# Allegro board MAIN.brd
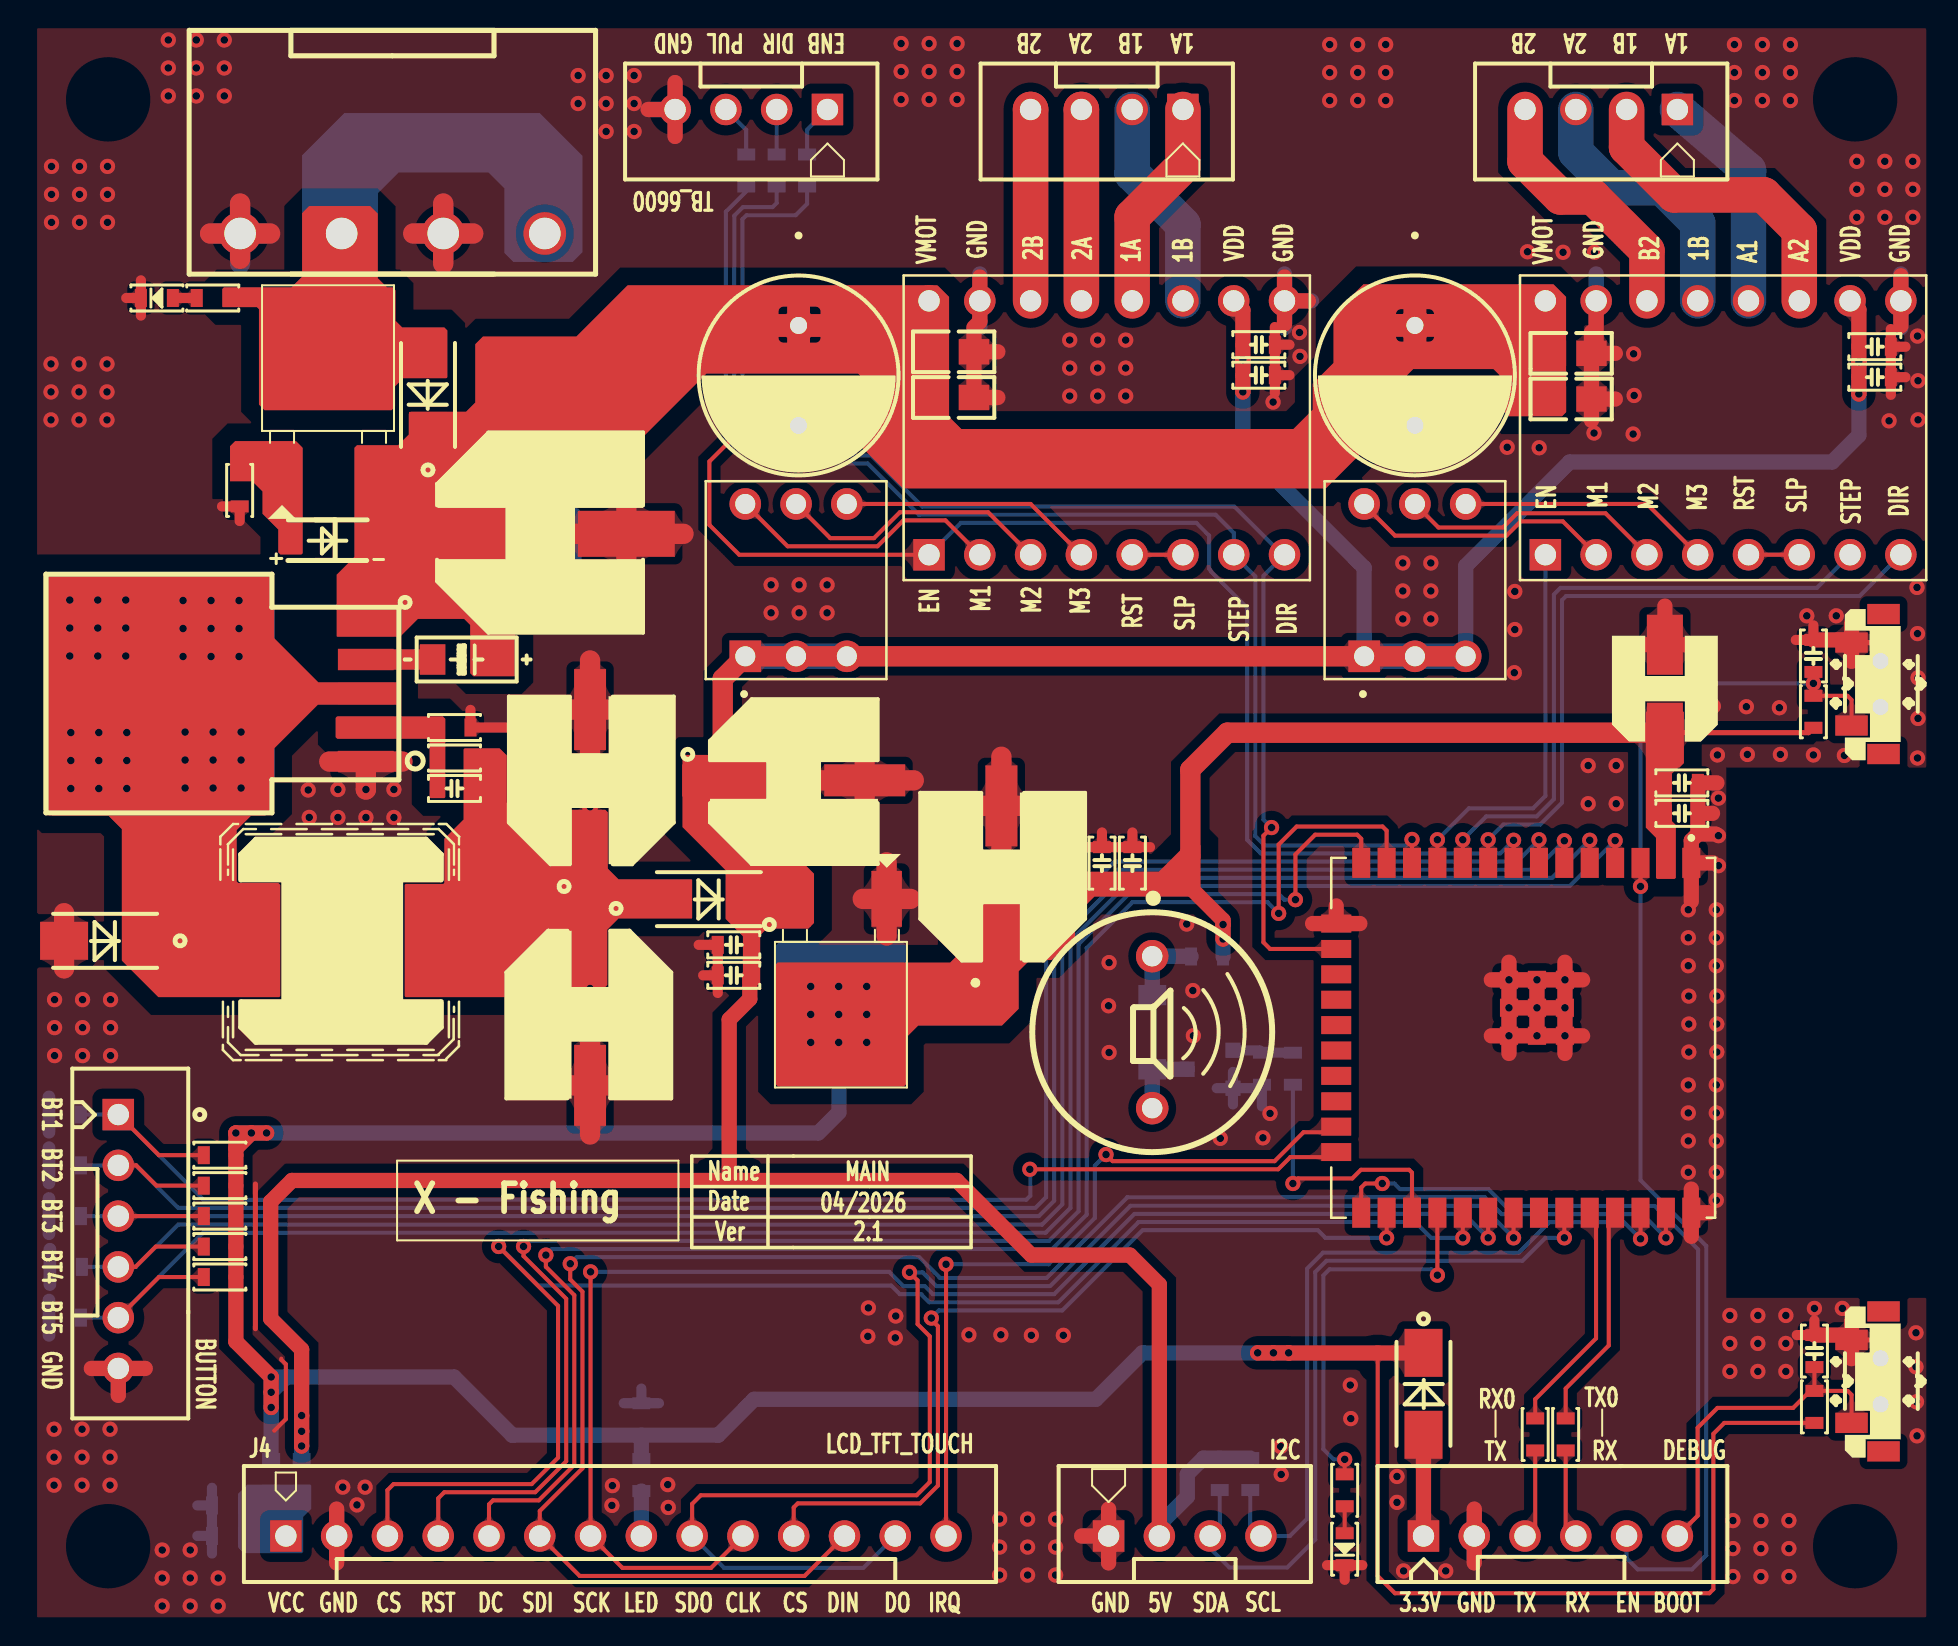
[diagram p0: board, top side]
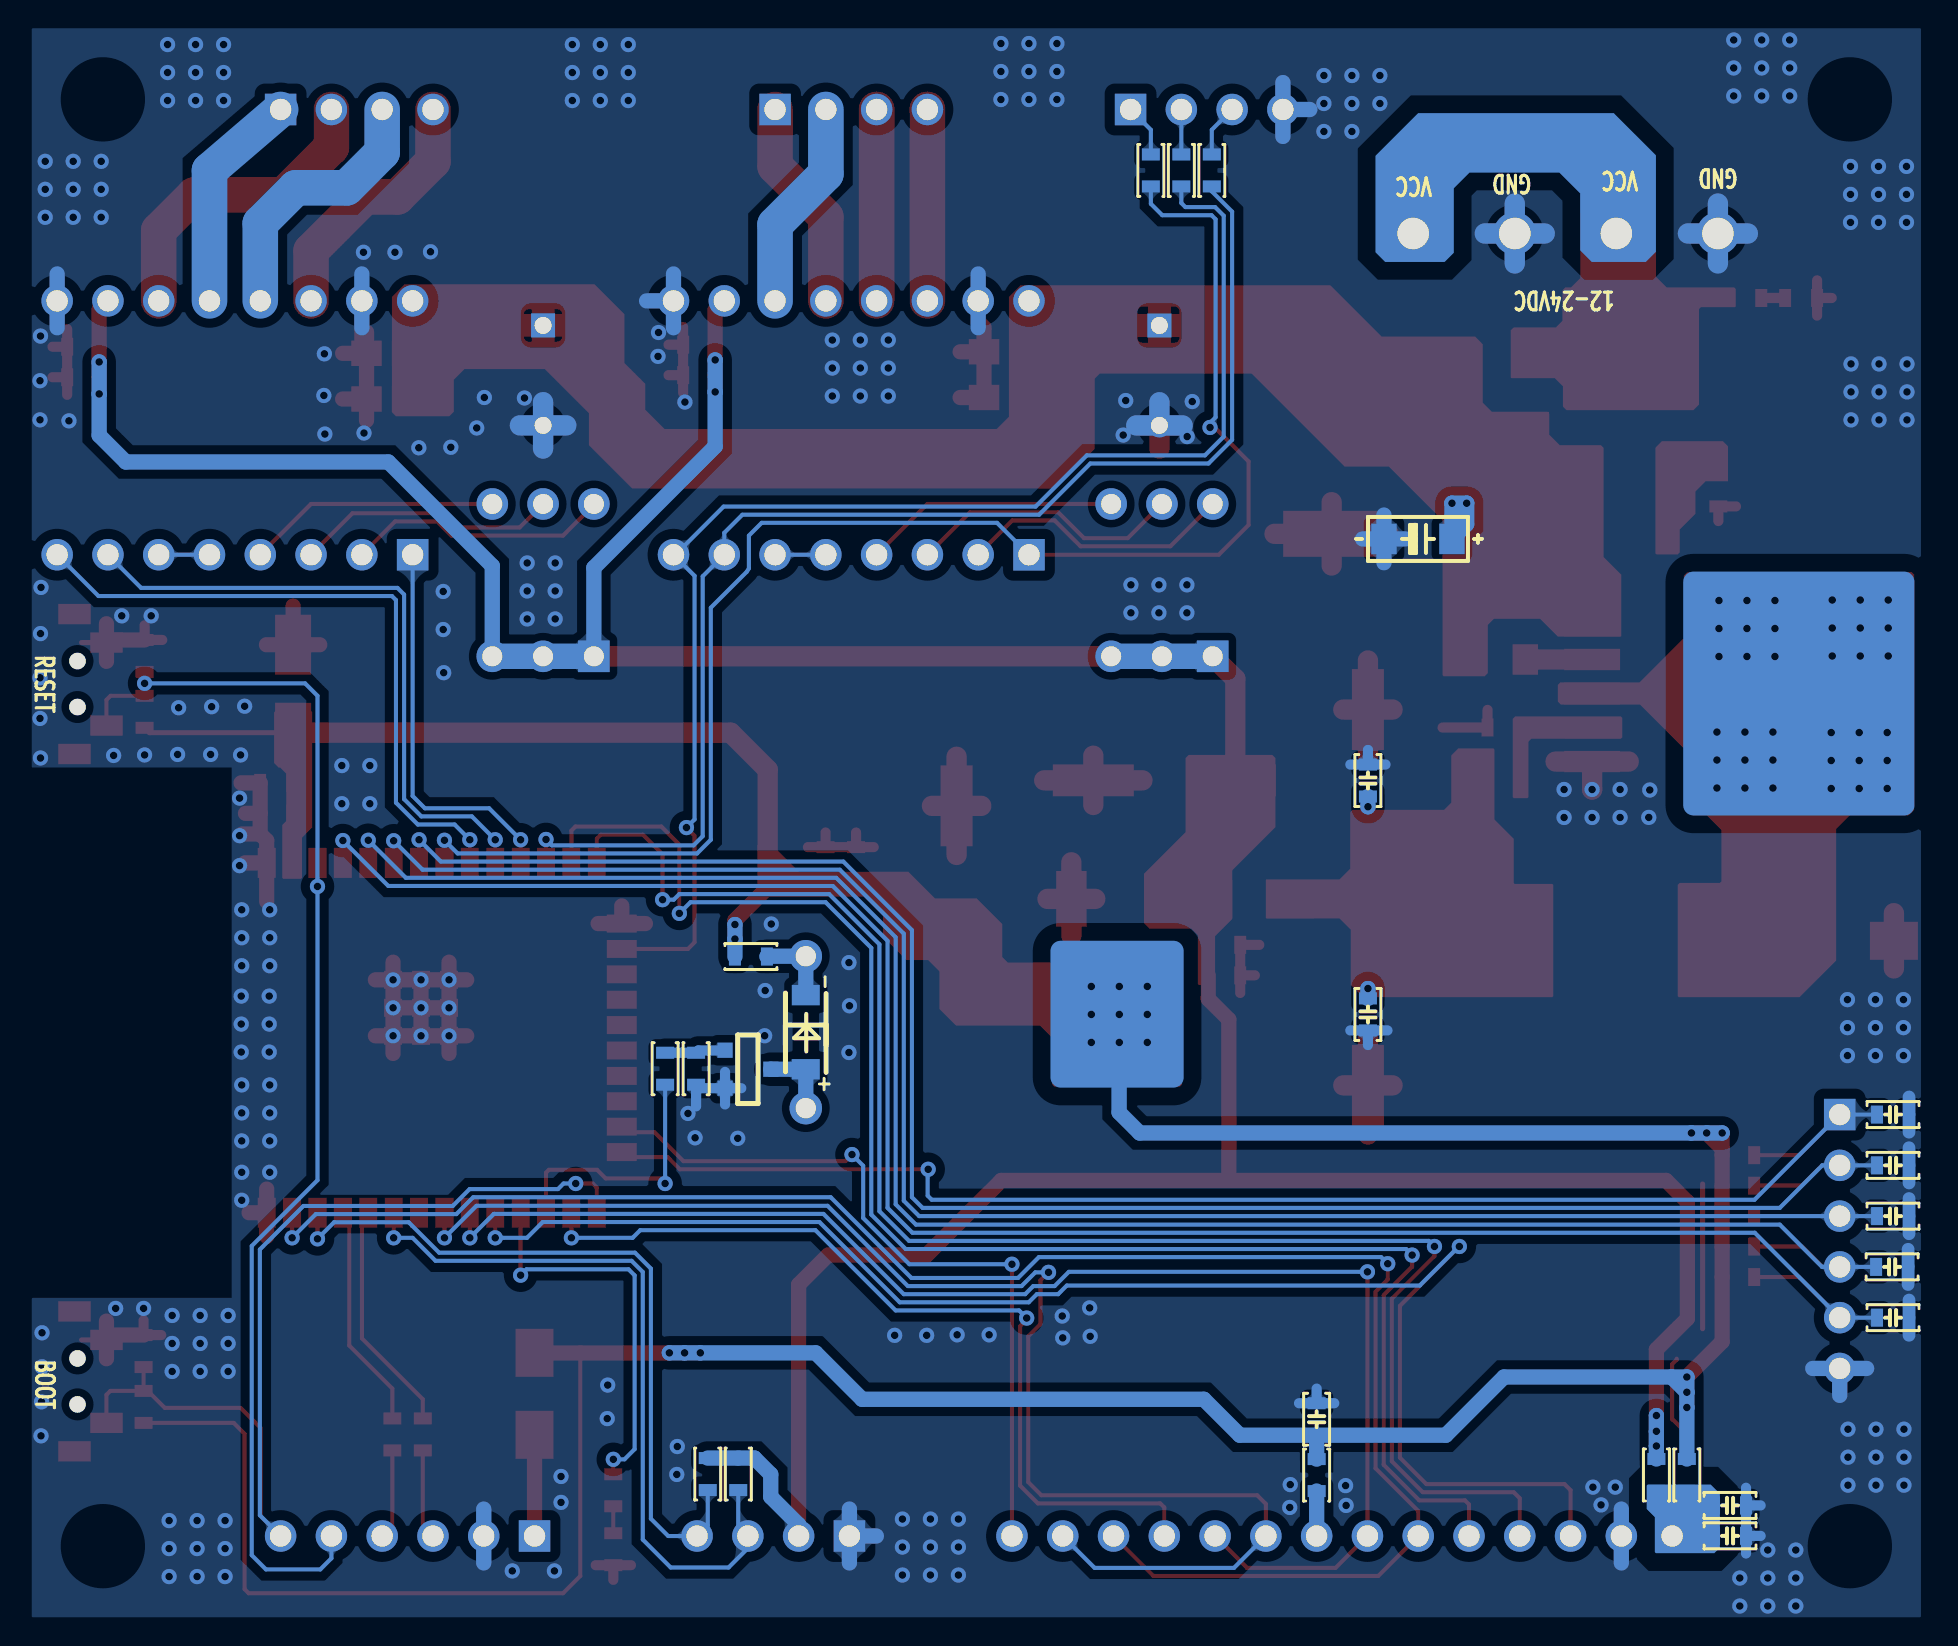
[diagram p1: board, bottom side, seen from below]

No outline. copper layers: TOP, BOTTOM. Coordinates in mm from the lowest, leftmost part position.

## Design rules (mm)
constraint set DEFAULT: min track width 0.203

## Placement (name value [footprint] x y rotation side)
B1  Through Hole  [BUZZER_TH]  56.03 29.52 0 top
C1  0.1uF  [C1206]  23.71 54.2 0 bottom
C2  330uF  [CASE_G]  25.41 54.45 0 top
C3  470uF  [RAD_SIZE_F]  27.91 30.41 270 top
C4  0.1uF  [C0603]  27.91 42.11 90 bottom
C5  220uF  [RAD_SIZE_F]  38.1 42.12 0 top
C6  1uF  [C0603]  82.52 40.47 0 top
C7  0.1uF  [C0603]  82.52 41.99 0 top
C8  0.1uF  [C0603]  89.1 48.34 90 top
C9  0.1uF  [C0603]  89.15 13.57 90 top
C10  470uF  [RAD_SIZE_F]  27.91 42.11 90 top
C11  0.1uF  [C0603]  35.1 33.89 180 top
C12  1uF  [C0603]  35.1 32.37 180 top
C13  0.1uF  [C0603]  53.52 37.98 90 top
C14  1uF  [C0603]  55.04 37.98 90 top
C15  470uF  [RAD_SIZE_F]  48.49 37.29 90 top
C17  0.1uF  [C0805]  46.1 63.56 90 top
C18  0.1uF  [C0805]  46.1 61.27 90 top
C19  1uF  [C0603]  92.18 63.81 0 top
C20  0.1uF  [C0603]  92.18 62.29 0 top
C21  220uF  [CAP_THRU_5MM]  69.17 62.38 270 top
C22  1uF  [C0603]  61.37 63.91 0 top
C23  0.1uF  [C0603]  61.37 62.39 0 top
C24  220uF  [CAP_THRU_5MM]  38.34 62.37 270 top
C25  0.1uF  [C0805]  76.99 63.48 90 top
C26  0.1uF  [C0805]  76.99 61.19 90 top
C27  0.1uF  [C0603]  9.8 5.85 180 bottom
C28  0.1uF  [C0603]  9.8 4.32 180 bottom
C29  100uF  [RAD_SIZE_C]  81.67 46.7 90 top
C30  0.1uF  [C0603]  30.48 10.16 90 bottom
C31  1uF  [C1206]  23.44 48.16 180 top
C32  1uF  [C0603]  27.91 30.41 270 bottom
C33  33nF  [C0603]  21.13 41.71 180 top
C34  0.1uF  [C0603]  1.65 25.4 180 bottom
C35  0.1uF  [C0603]  1.65 22.86 180 bottom
C36  0.1uF  [C0603]  1.65 20.32 180 bottom
C37  0.1uF  [C0603]  1.7 17.78 180 bottom
C38  0.1uF  [C0603]  1.65 15.24 180 bottom
D1  1N5819  [DO_214AC]  33.86 36.18 180 top
D2  SS34/B360  [DO_214AC]  3.66 34.09 180 top
D3  0603  [D0603]  6.25 66.25 180 top
D4  0603  [D0603]  65.66 3.66 270 top
D6  1N5819  [DO_214AC]  19.81 61.4 90 top
D7  1N4007  [DO_214AC]  69.6 11.43 270 top
D11  1N4148  [SOD_123]  56.03 29.52 90 bottom
DZ1  3.3V  [SOD_123]  14.81 54.13 0 top
J1  HEADER1X6  [HEADER1X6BUS]  69.6 4.32 0 top
J2  Domino4PinRA  [DOMINO4_200_RA]  18.03 69.47 180 top
J3  HEADER1X4  [SHDRV4W110P0_254_1X4]  53.85 4.32 0 top
J4  HEADER1X14  [HEADER_1X14_254_THRU]  12.7 4.32 0 top
J5  HEADER1X6  [HEADER1X6BUS]  4.32 25.4 270 top
J6  HEADER1X4  [SHDRV4W110P0_254_1X4]  57.57 75.68 180 top
J7  HEADER1X4  [SHDRV4W110P0_254_1X4]  82.3 75.68 180 top
J8  HEADER1X4  [SHDRV4W110P0_254_1X4]  39.79 75.68 180 top
L1  47uH  [DR127_SMD_IND]  15.52 34.09 0 top
NOREF  -  []  0 0 90 top
NOREF#2  -  []  0 80 0 top
Q1  AOD407  [DPAK]  14.81 61.4 0 top
Q3  MMBT2222  [SOT_23]  60.07 28.62 270 bottom
R1  10K  [R0603]  9.4 23.37 180 top
R2  0  [R0603]  13.49 7.37 90 bottom
R3  0  [R0603]  11.96 7.37 90 bottom
R4  2k2  [R0603]  30.48 7.37 90 bottom
R5  10K  [R0603]  9.4 21.84 180 top
R6  10K  [R0603]  9.4 20.32 180 top
R7  10K  [R0603]  9.4 18.8 180 top
R8  10K  [R0603]  9.4 17.27 180 top
R9  0  [R0603]  38.77 72.63 90 bottom
R10  0  [R0603]  76.71 9.4 270 top
R11  10K  [R0603]  89.1 45.55 270 top
R12  10K  [R0603]  89.15 10.78 270 top
R13  0  [R0603]  75.19 9.4 270 top
R14  0  [R0603]  37.25 72.63 90 bottom
R15  0  [R0603]  35.72 72.63 90 bottom
R16  2.2K  [R0603]  65.66 6.6 90 top
R17  2.2K  [R0603]  9.04 66.25 0 top
R18  4k7  [R0603]  60.93 7.42 270 bottom
R19  4k7  [R0603]  59.41 7.42 270 bottom
R20  2.2K  [R0603]  21.13 43.24 0 top
R21  2.2K  [R0603]  21.13 44.76 180 top
R23  47K  [R0603]  10.39 56.62 90 top
R33  10  [R0603]  58.78 33.31 180 bottom
R34  2k2  [R0603]  63.07 27.69 90 bottom
R35  10K  [R0603]  61.52 27.69 270 bottom
S1  DS01C_254_L_03  [SW_DS01C-254]  38.22 52.13 0 top
S2  DS01C_254_L_03  [SW_DS01C-254]  69.17 52.13 0 top
SW1  BUTTON  [BUTTON_SMD_2PIN_3X6X3_5_RA]  92.46 12.05 270 top
SW2  BUTTON  [BUTTON_SMD_2PIN_3X6X3_5_RA]  92.46 46.94 270 top
U2  LM1086  [DPAK]  40.46 32.24 180 top
U3  -  [ESP32_WROOM_32U]  74.59 29.24 270 top
U4  DRV_A4988  [MODULE_A4988]  53.76 59.75 90 top
U5  DRV8825  [IC_DRV8825]  84.59 59.76 90 top
U6  XL4015  [TO_263_5]  9.97 46.46 90 top

## Library data of the parts
B1 = buzzer
C1 C17 C18 C25 C26 C31 = NPOL_CAP
C2 C3 C5 C10 C15 C21 C24 C29 = POL_CAP
C4 C6-C9 C11-C14 C19 C20 C22 C23 C27 C28 C30 C32-C38 = NPOL_CAP: User Part Number: ***
D1 D2 D6 D7 = DIODE_AC
D3 D4 = LED: User Part Number: ***
D11 = DIODE
DZ1 = ZENER
J1 J5 = HEADER1X6
J2 J3 J6-J8 = HEADER1X4
J4 = HEADER1X14
L1 = IND_FERRITE
Q1 = MOSFET_P
Q3 = BJT_NPN
R1-R21 R23 R33-R35 = RES: User Part Number: ***
S1 S2 = DS01C_254_L_03
SW1 SW2 = SW_PUSHBUTTON_SPST_2P
U2 = LM1086_0
U3 = ESP32_WROOM_32U
U4 = DRV_A4988
U5 = DRV8825
U6 = XL4015_0

## Footprints (pads in the part's own frame, mm; a bottom-side part is the same pattern mirrored in y, then rotated)
BUTTON_SMD_2PIN_3X6X3_5_RA
  round 0.838 hole 0.813: (-1.15,0) (1.15,0)
  rect 1.016x1.626 smd: 1(-2.075,-1.45) 2(2.075,-1.45) 3(-3.5,0.15) 4(3.5,0.15)
BUZZER_TH
  round 1.626 hole 1.016: 1(0,3.8) 2(0,-3.8)
C0603
  rect 0.599x0.899 smd: 1(-0.8,0) 2(0.8,0)
C0805
  rect 1.27x1.524 smd: 1(0,1.016) 2(0,-1.016)
C1206
  rect 1.27x1.524 smd: 1(0,0) 2(3.4,0)
CAP_THRU_5MM
  rect 1.2x1.2 hole 0.85: 1(-2.5,0)
  round 1.2 hole 0.85: 2(2.5,0)
CASE_G
  rect 4.849x2.301 smd: 1(-4.318,0) 2(4.318,0)
D0603
  rect 0.599x0.899 smd: 1(-0.8,0) 2(0.8,0)
DO_214AC
  rect 2.4x1.9 smd: A(2.05,0) C(-2.05,0)
DOMINO4_200_RA
  round 2.134 hole 1.575: 1(-7.62,0) 2(-2.54,0) 3(2.54,0) 4(7.62,0)
DPAK
  rect 1.524x2.794 smd: 1(-2.286,-3.95) 3(2.286,-3.95)
  rect 6.299x6.096 smd: 2(0,2.3)
DR127_SMD_IND
  rect 4.318x5.588 smd: 1(-5.334,0) 2(5.334,0)
ESP32_WROOM_32U
  rect 1.5x0.9 smd: 1(-8.75,8.41) 2(-8.75,7.14) 3(-8.75,5.87) 4(-8.75,4.6) 5(-8.75,3.33) 6(-8.75,2.06) 7(-8.75,0.79) 8(-8.75,-0.48) 9(-8.75,-1.75) 10(-8.75,-3.02) 11(-8.75,-4.29) 12(-8.75,-5.56) 13(-8.75,-6.83) 14(-8.75,-8.1) 25(8.75,-8.1) 26(8.75,-6.83) 27(8.75,-5.56) 28(8.75,-4.29) 29(8.75,-3.02) 30(8.75,-1.75) 31(8.75,-0.48) 32(8.75,0.79) 33(8.75,2.06) 34(8.75,3.33) 35(8.75,4.6) 36(8.75,5.87) 37(8.75,7.14) 38(8.75,8.41)
  rect 0.9x1.5 smd: 15(-5.715,-9.35) 16(-4.445,-9.35) 17(-3.175,-9.35) 18(-1.905,-9.35) 19(-0.635,-9.35) 20(0.635,-9.35) 21(1.905,-9.35) 22(3.175,-9.35) 23(4.445,-9.35) 24(5.715,-9.35)
  rect 0.9x0.9 smd: 39_1(-2.9,2.09) 39_2(-1.5,2.09) 39_3(-0.1,2.09) 39_4(-2.9,0.69) 39_5(-1.5,0.69) 39_6(-0.1,0.69) 39_7(-2.9,-0.71) 39_8(-1.5,-0.71) 39_9(-0.1,-0.71)
HEADER1X6BUS
  rect 1.575x1.575 hole 1.067: 1(0,0)
  round 1.575 hole 1.067: 2(2.54,0) 3(5.08,0) 4(7.62,0) 5(10.16,0) 6(12.7,0)
HEADER_1X14_254_THRU
  rect 1.575x1.575 hole 1.067: 1(0,0)
  round 1.575 hole 1.067: 2(2.54,0) 3(5.08,0) 4(7.62,0) 5(10.16,0) 6(12.7,0) 7(15.24,0) 8(17.78,0) 9(20.32,0) 10(22.86,0) 11(25.4,0) 12(27.94,0) 13(30.48,0) 14(33.02,0)
IC_DRV8825
  rect 1.575x1.575 hole 1.067: 1(-6.35,8.89)
  round 1.575 hole 1.067: 2(-6.35,6.35) 3(-6.35,3.81) 4(-6.35,1.27) 5(-6.35,-1.27) 6(-6.35,-3.81) 7(-6.35,-6.35) 8(-6.35,-8.89) 9(6.35,-8.89) 10(6.35,-6.35) 11(6.35,-3.81) 12(6.35,-1.27) 13(6.35,1.27) 14(6.35,3.81) 15(6.35,6.35) 16(6.35,8.89)
MODULE_A4988
  rect 1.575x1.575 hole 1.067: 1(-6.35,8.89)
  round 1.575 hole 1.067: 2(-6.35,6.35) 3(-6.35,3.81) 4(-6.35,1.27) 5(-6.35,-1.27) 6(-6.35,-3.81) 7(-6.35,-6.35) 8(-6.35,-8.89) 9(6.35,-8.89) 10(6.35,-6.35) 11(6.35,-3.81) 12(6.35,-1.27) 13(6.35,1.27) 14(6.35,3.81) 15(6.35,6.35) 16(6.35,8.89)
R0603
  rect 0.599x0.899 smd: 1(-0.8,0) 2(0.8,0)
RAD_SIZE_C
  rect 3x1.8 smd: 1(-2.2,0) 2(2.2,0)
RAD_SIZE_F
  rect 4.049x1.6 smd: 1(-3.55,0) 2(3.55,0)
SHDRV4W110P0_254_1X4
  rect 1.575x1.575 hole 1.067: 1(0,0)
  round 1.575 hole 1.067: 2(2.54,0) 3(5.08,0) 4(7.62,0)
SOD_123
  rect 1.016x1.397 smd: 1(-1.854,0) 2(1.854,0)
SOT_23
  rect 0.762x0.762 smd: 1(0,0) 2(1.9,0) 3(0.95,2.291)
SW_DS01C-254
  rect 1.58x1.58 hole 1: 1A(-2.54,-3.81)
  round 1.58 hole 1: 1B(-2.54,3.81) 2A(0,-3.81) 2B(0,3.81) 3A(2.54,-3.81) 3B(2.54,3.81)
TO_263_5
  rect 1.067x2.794 smd: 1(-3.404,-6.731) 2(-1.702,-6.731) 3(0,-6.731) 4(1.702,-6.731) 5(3.404,-6.731)
  rect 11.43x10.668 smd: 6(0,3.683)

## Nets
+3.3V: C6.1 C7.1 C13.1 C14.1 C15.1 C29.1 C30.1 D7.C(CATHODE) R1.1 R3.2 R4.2 R5.1 R6.1 R7.1 R8.1 R11.2 R12.2 R33.1 U2.2(OUTPUT) U3.2
+5V: C5.1 C11.1 C12.1 C19.1 C20.1 C22.1 C23.1 D1.C(CATHODE) J3.2 R2.2 R18.1 R19.1 S1.1A S1.2A S1.3A S2.1A S2.2A S2.3A U2.3 U4.10 U5.10
+24V: D6.A J2.1 J2.3 Q1.2 R17.2
+24V_OUT: C1.1 C2.1 C17.1 C18.1 C21.1 C24.1 C25.1 C26.1 C31.1 D6.C(CATHODE) DZ1.2(CATHODE) Q1.3(SOURCE) U4.16(VMOT) U5.16(VMOT) U6.5(VIN)
GND: C1.2 C2.2 C3.2 C4.2 C5.2 C6.2 C7.2 C8.2 C9.2 C10.2 C11.2 C12.2 C13.2 C14.2 C15.2 C17.2 C18.2 C19.2 C20.2 C21.2 C22.2 C23.2 C24.2 C25.2 C26.2 C27.2 C28.2 C29.2 C30.2 C32.2 C34.2 C35.2 C36.2 C37.2 C38.2 D2.A D3.2(CATHODE) D4.2(CATHODE) J1.2 J2.2 J2.4 J3.1 J4.2 J5.6 J8.4 Q3.2 R21.1 R23.1 R35.2 SW1.1 SW2.1 U2.1 U3.1 U3.15 U3.38 U3.39_1 U3.39_2 U3.39_3 U3.39_4 U3.39_5 U3.39_6 U3.39_7 U3.39_8 U3.39_9 U4.9 U4.15 U5.9 U5.15 U6.1
VCC: C27.1 C28.1 J4.1 R2.1 R3.1
1A: J6.1 U4.12
1B: J6.2 U4.11
2A: J6.3 U4.13
2B: J6.4 U4.14
A1: J7.1 U5.12
A2: J7.2 U5.11
B1: J7.3 U5.13
B2: J7.4 U5.14
BTN1: C34.1 J5.1 R1.2 U3.24
BTN2: C35.1 J5.2 R5.2 U3.7
BTN3: C36.1 J5.3 R6.2 U3.6
BTN4: C37.1 J5.4 R7.2 U3.5
BTN5: C38.1 J5.5 R8.2 U3.4
BUZZER: R34.1 U3.27
DIR_4988: R14.1 U3.16 U4.8
DIR_6600: J8.2 R14.2
DIR_8825: U3.9 U5.8
EN: C8.1 J1.5 R11.1 SW2.2 U3.3
ENB_4988: R9.1 U3.8 U4.1
ENB_6600: J8.1 R9.2
ENB_8825: U3.11 U5.1
IO0_BOOT: C9.1 J1.6 R12.1 SW1.2 U3.25
LED: R16.2 U3.28
M0: S2.1B U5.2
M1: S2.2B U5.3
M2: S2.3B(NO3) U5.4
MS1: S1.1B U4.2
MS2: S1.2B U4.3
MS3: S1.3B(NO3) U4.4
PUL_6600: J8.3 R15.2
RX: J1.4 R10.2
RXD0: R13.1 U3.34
SCL: J3.4 R18.2 U3.36
SDA: J3.3 R19.2 U3.33
STEP_4988: R15.1 U3.12 U4.7
STEP_8825: U3.10 U5.7
T_CS: J4.11 U3.26
T_IRQ: J4.14 U3.23
TFT_CS: J4.3 U3.29
TFT_DC: J4.5 U3.13
TFT_LED: J4.8 R4.1
TFT_RST: J4.4 U3.14
TFT_SCK: J4.7 J4.10 U3.30
TFT_SDI: J4.6 J4.12 U3.37
TFT_SDO: J4.9 J4.13 U3.31
TX: J1.3 R13.2
TXD0: R10.1 U3.35(TXD0/IO1)
N15737205: B1.1 D11.2(CATHODE) R33.2
N15737229: B1.2(-) D11.1 Q3.3(E)
N15737285: Q3.1 R34.2 R35.1
N15870025: D4.1 R16.1
N15928174: D7.A J1.1
N15936945: U4.5 U4.6
N15939447: U5.5 U5.6
N15940057: D3.1 R17.1
N15940775: D2.C(CATHODE) L1.1 U6.3 U6.6
N15941130: C31.2 U6.4
N15942034: C3.1 C4.1 C10.1 C32.1 C33.1 D1.A L1.2 R20.2
N15942465: C33.2 R20.1 R21.2 U6.2
N15945795: DZ1.1 Q1.1 R23.2

Pads without a net: SW1 3 4; SW2 3 4; U3 17 18 19 20 21 22 32

## Via types
v1: diameter 0.762, hole 0.381, TOP to BOTTOM, 372 vias

## Routing (per net, layer and track width the routed paths; a pad name or vN(x,y) marks a point on that pad's centre or on a via; arc(x,y) is an arc through that point)
+3.3V: length 206.6
  TOP w0.203: R12.2 84.65,9.98 84.1,9.43 84.1,1.66 83.9,1.45 68.17,1.45 67.31,2.32 67.31,13.47
  TOP w0.254: C29.1 88.86,44.5 R11.2
  TOP w0.762: v1(11.96,10.75) v1(11.96,11.51) v1(11.96,12.27) 11.96,12.27 10.2,14.04 R8.1 R7.1 R6.1 R5.1 R1.1 10.2,23.7 ; v1(61.31,13.48) v1(62.09,13.48) v1(62.86,13.48) 62.86,13.47 69.59,13.47 D7.C ; 10.2,23.7 v1(10.2,24.48) v1(10.97,24.48) ; 10.2,23.7 v1(10.97,24.48) ; 57.16,37.53 59.58,35.12 v1(59.58,34.91) v1(59.58,34.18) ; v1(10.97,24.48) v1(11.73,24.48)
  TOP w1.016: 56.72,37.09 57.94,38.31 57.94,42.65 59.79,44.5 C29.1
  BOTTOM w0.762: v1(10.2,24.48) v1(10.97,24.48) v1(11.73,24.48) 39.33,24.48 40.36,25.51 40.36,30.41 ; C30.1 24.02,9.36 21.11,12.27 12.73,12.27 ; C30.1 34.32,9.36 36.12,11.16 53.21,11.16 55.54,13.48 v1(61.31,13.48) v1(62.09,13.48) v1(62.86,13.48) ; C30.1 R4.2 ; 12.73,12.27 v1(11.96,11.51) ; 12.73,12.27 v1(11.96,12.27) v1(11.96,11.51) ; R3.2 v1(11.96,10.75) v1(11.96,11.51) ; v1(59.58,34.91) v1(59.58,34.18) R33.1
  vias: v1(38.95,31.81) v1(38.95,30.41) v1(38.95,29.01) v1(40.35,31.81) v1(40.35,30.41) v1(40.35,29.01) v1(41.75,31.81) v1(41.75,30.41) v1(41.75,29.01)
+5V: length 202.8
  TOP w0.762: C12.1 35.9,31.18 34.87,30.16 34.87,22.1 ; J3.2 56.39,16.89 54.91,18.37 49.99,18.37 46.25,22.1 34.87,22.1 ; v1(13.49,8.82) v1(13.49,9.56) v1(13.49,10.34) 13.49,13.65 11.94,15.2 11.94,21.04 13,22.1 34.87,22.1 ; U4.10 60.57,65.65 C22.1 v1(60.57,63.15) C23.1 v1(60.57,61.55) ; U5.10 91.38,65.67 C19.1 v1(91.38,63.05) C20.1 v1(91.38,61.45)
  TOP w1.016: S2.3A S2.2A S2.1A S1.3A S1.2A S1.1A 34.55,47.2 C5.1
  BOTTOM w0.762: S2.3A 71.71,52.85 76.91,58.04 90.04,58.04 91.38,59.38 v1(91.38,61.45) v1(91.38,63.05) ; S2.1A 66.63,52.75 60.57,58.82 v1(60.57,61.55) v1(60.57,63.15) ; J3.2 56.39,4.88 57.78,6.28 57.78,7.4 58.6,8.22 R19.1 R18.1 ; v1(13.49,10.34) v1(13.49,9.56) v1(13.49,8.82) R2.2
  BOTTOM w1.27: S2.3A S2.2A S2.1A ; S1.3A S1.2A S1.1A
+24V_OUT: length 15.7
  TOP w0.762: v1(22.98,55.98) v1(23.71,55.98)
  TOP w1.143: C24.1 38.34,63.67 ; C24.1 36.76,64.87 ; C24.1 38.34,66.18 ; C24.1 39.72,64.87 ; C21.1 69.17,66.01 ; C21.1 67.74,64.88 ; C21.1 70.36,64.88 ; C21.1 69.17,63.75
  BOTTOM w0.762: v1(23.71,55.98) v1(22.98,55.98) 22.98,54.93 C1.1 v1(23.71,55.98)
GND: length 292.4
  TOP w0.203: 12.47,13.19 12.47,13.14 12.7,12.91 12.7,10.17 12.12,9.58
  TOP w0.254: SW1.1 92.25,14.13 ; SW2.1 92.25,49.01 ; 11.18,21.93 11.18,14.69
  TOP w0.508: 89.1,49.87 C8.2 88.22,49.14 ; C22.2 62.9,63.91 ; C22.2 C23.2 ; C22.2 62.17,64.79 ; C23.2 62.9,62.39 ; C23.2 62.17,61.51 ; D3.2 5.45,65.37 ; D3.2 4.72,66.25 ; D3.2 5.45,67.13 ; 24.18,44.76 R21.1 21.93,45.64 ; C13.2 52.64,38.78 ; C13.2 C14.2 ; C13.2 53.52,39.51 ; 10.39,55.09 R23.1 9.51,55.82 ; C20.2 92.98,61.41 ; C20.2 93.71,62.29 ; C20.2 C19.2 ; 88.27,14.37 C9.2 89.15,15.1 ; C19.2 93.71,63.81 ; C19.2 92.98,64.69 ; C14.2 55.04,39.51 ; C14.2 55.92,38.78 ; C12.2 33.57,32.37 ; C12.2 34.3,31.48 ; C12.2 C11.2 33.35,33.89 ; 62.65,64.91 62.65,64.95 ; D4.2 64.78,2.86 ; D4.2 66.54,2.86 ; D4.2 65.66,2.13
  TOP w0.762: C25.2 C26.2 ; C25.2 78,64.55 ; C25.2 78.24,63.71 U5.15 ; C25.2 79.2,63.48 ; C26.2 79.2,61.19 ; C26.2 78,60.13 ; 84.22,39.43 83.32,39.43 83,39.11 U3.1 ; v1(73.88,32.14) 72.99,32.14 ; v1(73.88,32.14) v1(73.88,30.74) ; v1(73.88,32.14) v1(75.28,32.14) ; v1(73.88,32.14) 73.88,33.02 ; U3.15 64.05,34.95 ; U3.15 65.24,35.84 ; U3.15 66.42,34.95 ; C17.2 48.31,63.56 ; C17.2 47.12,64.62 ; C17.2 C18.2 48.31,61.27 ; v1(75.28,29.34) v1(76.68,29.34) ; v1(75.28,29.34) v1(73.88,29.34) ; v1(75.28,29.34) v1(75.28,30.74) ; v1(76.68,29.34) v1(76.68,30.74) ; v1(76.68,29.34) 76.68,28.46 ; v1(76.68,29.34) 77.56,29.34 ; v1(76.68,30.74) v1(76.68,32.14) ; v1(76.68,30.74) v1(75.28,30.74) ; v1(75.28,32.14) v1(76.68,32.14) ; v1(75.28,32.14) v1(75.28,30.74) ; v1(76.68,32.14) 77.56,32.14 ; v1(76.68,32.14) 76.68,33.02 ; SW1.1 91.01,13.19 ; SW1.1 90.77,14.37 C9.2 ; SW1.1 91.01,15.07 ; v1(73.88,30.74) v1(73.88,29.34) ; v1(73.88,30.74) v1(75.28,30.74) ; C29.2 80.34,48.9 ; C29.2 83.01,48.9 ; C29.2 81.67,50.83 ; J8.4 32.17,77.02 ; J8.4 30.82,75.68 ; J8.4 32.17,74.33 ; U4.9 62.65,67.3 ; U4.9 62.65,64.95 ; U4.9 63.85,66.1 ; 47.12,64.78 47.41,65.07 U4.15 47.41,67.3 ; U3.38 83,19.31 ; U3.38 83.88,20.49 ; U3.38 83,21.67 ; 72.14,2.97 J1.2 72.14,5.66 ; C6.2 84.06,40.47 ; C6.2 C7.2 84.28,41.99 ; C6.2 83.32,39.59 ; J5.6 2.97,12.7 ; J5.6 5.66,12.7 ; J5.6 4.32,11.35 ; SW2.1 91.01,49.95 ; SW2.1 91.01,48.07 ; SW2.1 90.88,49.14 C8.2 ; v1(73.88,29.34) 72.99,29.34 ; v1(73.88,29.34) 73.88,28.46 ; U3.1 83,36.06 ; U3.1 84.08,37.99 ; 93.48,64.85 U5.9 93.48,67.36 ; J3.1 53.85,5.66 ; J3.1 52.5,4.32 ; J3.1 53.85,2.97 ; 15.24,2.97 J4.2 15.24,5.66
  TOP w1.016: C15.2 49.72,40.84 ; C15.2 48.49,43.3 ; C15.2 48.49,38.39 ; C15.2 47.26,40.84 ; J2.4 8.91,69.47 ; J2.4 10.41,70.97 ; J2.4 11.91,69.47 ; J2.4 10.41,68.21 ; 1.61,35.47 D2.A 1.61,32.71 ; C21.2 70.33,59.88 ; C21.2 68.01,59.88 ; C21.2 69.17,58.72 ; C21.2 69.17,61.04 ; U6.1 18.53,43.06 ; U6.1 14.87,43.06 ; U6.1 16.7,41.66 v1(16.7,41.66) ; C3.2 27.91,24.4 ; C3.2 27.91,29.32 ; C3.2 26.68,26.86 ; C3.2 29.15,26.86 ; C24.2 38.34,61.03 ; C24.2 38.34,58.71 ; C24.2 39.5,59.87 ; C24.2 37.18,59.87 ; C10.2 26.68,45.66 ; C10.2 29.15,45.66 ; C10.2 27.91,43.2 ; C10.2 27.91,48.12 ; C5.2 41.65,40.89 ; C5.2 44.11,42.12 ; C5.2 39.19,42.12 ; C5.2 41.65,43.35 ; U2.1 42.75,34.36 ; U2.1 42.75,38.02 ; U2.1 43.94,36.19 ; U2.1 41.55,36.19 ; J2.2 20.57,70.97 ; J2.2 20.57,67.98 ; J2.2 22.07,69.47 ; J2.2 19.07,69.47 ; C2.2 29.73,56.03 ; C2.2 29.73,52.87 ; C2.2 32.59,54.45 ; C2.2 26.87,54.45
  BOTTOM w0.508: C28.2 C27.2 ; C28.2 8.27,4.32 ; C28.2 9,3.44 ; C27.2 8.27,5.85 ; C27.2 9,6.73 ; Q3.2 60.07,27.53 ; Q3.2 61.35,26.72 R35.2 61.52,25.81 ; Q3.2 60.07,25.91 ; Q3.2 59.26,26.72 ; C4.2 28.8,42.91 ; C4.2 27.91,43.64 ; C4.2 27.03,42.91 ; C32.2 27.91,28.88 ; C32.2 28.8,29.61 ; C32.2 26.94,29.61 ; C30.2 30.48,11.69 ; C30.2 31.36,10.96 ; C30.2 29.6,10.96
  BOTTOM w0.635: 0.85,21.2 C36.2 0.85,19.44 ; 0.85,14.36 C38.2 0.85,16.12 ; 0.85,26.28 C34.2 0.85,24.52 ; 0.85,23.74 C35.2 0.85,21.98 ; 0.9,16.9 C37.2 0.9,18.66
  BOTTOM w0.762: J3.1 53.85,5.66 ; J3.1 53.85,2.97 ; J3.1 52.5,4.32 ; C1.2 26.05,54.2 ; C1.2 28.18,54.2 ; C1.2 27.11,53 ; C1.2 27.11,55.39 ; J5.6 2.97,12.7 ; J5.6 4.32,11.35 ; J5.6 5.66,12.7 ; U4.9 62.65,64.76 ; U4.9 64,66.1 ; U4.9 62.65,67.45 ; 78.24,64.76 U5.15 78.24,67.45 ; 47.41,64.76 U4.15 47.41,67.45 ; 72.14,2.97 J1.2 72.14,5.66 ; 93.48,67.45 U5.9 93.48,64.76 ; 15.24,2.97 J4.2 15.24,5.66 ; J8.4 32.17,74.33 ; J8.4 32.17,77.02 ; J8.4 30.82,75.68
  BOTTOM w1.016: C21.2 68.01,59.88 ; C21.2 69.17,61.04 ; C21.2 70.33,59.88 ; C21.2 69.17,58.72 ; C24.2 38.34,61.03 ; C24.2 39.5,59.87 ; C24.2 37.18,59.87 ; J2.2 20.57,67.98 ; J2.2 20.57,70.97 ; J2.2 19.07,69.47 ; J2.2 22.07,69.47 ; J2.4 10.41,67.98 ; J2.4 10.41,70.97 ; J2.4 8.91,69.47 ; J2.4 11.91,69.47
  vias: v1(0.98,72.83) v1(0.98,71.43) v1(0.98,70.03) v1(0.95,62.95) v1(0.95,61.55) v1(0.95,60.15) v1(1.13,31.15) v1(1.13,29.75) v1(1.13,28.35) v1(1.11,9.66) v1(1.11,8.26) v1(1.11,6.86) v1(2.38,72.83) v1(2.38,71.43) v1(2.38,70.03) v1(2.35,62.95) v1(2.35,61.55) v1(2.35,60.15) v1(2.53,31.15) v1(2.53,29.75) v1(2.53,28.35) v1(2.51,9.66) v1(2.51,8.26) v1(2.51,6.86) v1(3.78,72.83) v1(3.78,71.43) v1(3.78,70.03) v1(3.75,62.95) v1(3.75,61.55) v1(3.75,60.15) v1(3.93,31.15) v1(3.93,29.75) v1(3.93,28.35) v1(3.91,9.66) v1(3.91,8.26) v1(3.91,6.86) v1(6.52,3.62) v1(6.52,2.22) v1(6.52,0.82) v1(6.82,79.16) v1(6.82,77.76) v1(6.82,76.36) v1(7.92,3.62) v1(7.92,2.22) v1(7.92,0.82) v1(8.22,79.16) v1(8.22,77.76) v1(8.22,76.36) v1(9.32,2.22) v1(9.32,0.82) v1(9.62,79.16) v1(9.62,77.76) v1(9.62,76.36) v1(13.82,41.64) v1(13.87,40.26) v1(15.3,41.66) v1(15.3,40.26) v1(15.54,6.76) v1(16.26,5.87) v1(16.7,40.26) v1(16.66,6.76) v1(18.1,41.66) v1(18.1,40.26) v1(27.32,77.38) v1(27.32,75.98) v1(28.72,77.38) v1(28.72,75.98) v1(28.72,74.58) v1(29.03,6.84) v1(29.01,5.85) v1(30.12,77.38) v1(30.12,75.98) v1(30.12,74.58) v1(31.8,6.89) v1(31.83,5.75) v1(36.7,61.07) v1(36.96,59.31) v1(36.97,51.9) v1(36.97,50.5) v1(38.37,51.9) v1(38.37,50.5) v1(39.77,51.9) v1(39.77,50.5) v1(40.03,61.12) v1(40.16,59.39) v1(41.83,15.73) v1(41.81,14.31) v1(43.21,15.32) v1(43.18,14.23) v1(43.47,78.98) v1(43.47,77.58) v1(43.47,76.18) v1(44.87,78.98) v1(44.87,77.58) v1(44.87,76.18) v1(46.27,78.98) v1(46.27,77.58) v1(46.27,76.18) v1(46.86,14.38) v1(48.4,5.17) v1(48.4,3.77) v1(48.4,2.37) v1(48.46,14.38) v1(49.8,5.17) v1(49.8,3.77) v1(49.8,2.37) v1(49.99,14.36) v1(51.2,5.17) v1(51.2,3.77) v1(51.2,2.37) v1(51.59,14.36) v1(51.91,64.14) v1(51.91,62.74) v1(51.91,61.34) v1(53.31,64.14) v1(53.31,62.74) v1(53.31,61.34) v1(53.85,30.84) v1(53.87,33) v1(53.87,28.5) v1(54.71,64.14) v1(54.71,62.74) v1(54.71,61.34) v1(57.76,34.93) v1(58.06,31.6) v1(58.09,29.34) v1(59.44,24.21) v1(61.57,24.24) v1(61.93,25.46) v1(62.08,61.04) v1(62.46,8.79) v1(62.48,7.4) v1(63.4,64.52) v1(63.42,63.33) v1(64.91,78.93) v1(64.91,77.53) v1(64.91,76.13) v1(65.94,11.87) v1(65.96,10.19) v1(66.31,78.93) v1(66.31,77.53) v1(66.31,76.13) v1(67.71,78.93) v1(67.71,77.53) v1(67.71,76.13) v1(68.28,7.3) v1(68.28,6) v1(68.57,52.99) v1(68.57,51.59) v1(68.57,50.19) v1(68.61,2.57) v1(69.97,52.99) v1(69.97,51.59) v1(69.97,50.19) v1(70.1,61.25) v1(70.71,2.57) v1(72.11,61.27) v1(72.49,59.75) v1(73.79,58.78) v1(74.14,47.5) v1(74.17,51.57) v1(74.17,49.66) v1(74.8,68.56) v1(75.39,58.76) v1(76.58,68.54) v1(77.84,42.86) v1(77.84,40.95) v1(78.13,59.49) v1(78.16,68.54) v1(79.24,42.86) v1(79.24,40.95) v1(80.11,63.46) v1(80.14,61.37) v1(80.09,59.44) v1(82.85,35.65) v1(82.85,34.25) v1(82.85,32.85) v1(82.85,26.88) v1(82.85,25.48) v1(82.85,24.08) v1(82.85,22.51) v1(82.87,31.33) v1(82.87,29.93) v1(82.87,28.53) v1(84.1,45.83) v1(84.25,35.65) v1(84.25,34.25) v1(84.25,32.85) v1(84.25,26.88) v1(84.25,25.48) v1(84.25,24.08) v1(84.25,22.51) v1(84.25,21.11) v1(84.3,43.39) v1(84.27,31.33) v1(84.27,29.93) v1(84.27,28.53) v1(84.35,41.23) v1(84.35,39.35) v1(84.35,37.85) v1(84.93,15.35) v1(84.93,13.95) v1(84.93,12.55) v1(85.08,5.09) v1(85.08,3.69) v1(85.08,2.29) v1(85.15,78.93) v1(85.15,77.53) v1(85.15,76.13) v1(85.75,45.8) v1(85.8,43.41) v1(86.33,15.35) v1(86.33,13.95) v1(86.33,12.55) v1(86.48,5.09) v1(86.48,3.69) v1(86.48,2.29) v1(86.55,78.93) v1(86.55,77.53) v1(86.55,76.13) v1(87.4,45.75) v1(87.45,43.41) v1(87.73,15.35) v1(87.73,13.95) v1(87.73,12.55) v1(87.88,5.09) v1(87.88,3.69) v1(87.88,2.29) v1(87.95,78.93) v1(87.95,77.53) v1(87.95,76.13) v1(88.77,50.35) v1(89.1,43.39) v1(89.15,15.7) v1(90.25,50.35) v1(90.55,15.7) v1(90.65,43.36) v1(91.28,73.08) v1(91.28,71.68) v1(91.28,70.28) v1(92.68,73.08) v1(92.68,71.68) v1(92.68,70.28) v1(92.89,60.1) v1(94.08,73.08) v1(94.08,71.68) v1(94.08,70.28) v1(94.23,14.48) v1(94.23,12.78) v1(94.31,64.34) v1(94.34,62.11) v1(94.34,60.15) v1(94.28,51.77) v1(94.31,49.46) v1(94.34,47.25) v1(94.34,45.22) v1(94.31,43.24) v1(94.26,11.03) v1(94.28,9.33)
1A: length 10.6
  TOP w1.778: U4.12 55.03,70.3 57.57,72.84 J6.1
1B: length 10.6
  BOTTOM w1.778: U4.11 57.57,69.92 55.03,72.46 J6.2
2A: length 9.6
  TOP w1.778: U4.13 52.49,75.68 J6.3
2B: length 9.6
  TOP w1.778: J6.4 49.95,75.68 U4.14
A1: length 11.2
  BOTTOM w1.778: J7.1 85.86,72.63 U5.12
A2: length 15.8
  TOP w1.778: U5.11 88.4,69.63 86.62,71.41 82.14,71.41 79.76,73.79 J7.2
B1: length 13.6
  BOTTOM w1.778: J7.3 77.22,73.54 79,71.76 81.54,71.76 83.32,69.98 U5.13
B2: length 13
  TOP w1.778: U5.14 80.78,68.61 78.08,71.3 76.46,71.3 74.68,73.08 J7.4
BTN1: length 71.5
  TOP w0.203: R1.2 6.35,23.37 J5.1 ; v1(49.91,22.66) 62.33,22.66 62.94,23.27 64.98,23.27 U3.24
  BOTTOM w0.203: v1(49.91,22.66) 49.94,22.64 49.94,21.34 49.73,21.14 8.58,21.14 J5.1 C34.1
BTN2: length 95.1
  TOP w0.203: R5.2 6.23,21.84 5.21,22.86 J5.2 ; U3.7 v1(75.38,39.15)
  BOTTOM w0.203: v1(75.38,39.15) 74.28,38.06 54.15,38.06 50.72,34.63 50.72,21.27 50.19,20.73 7.32,20.73 5.19,22.86 J5.2 C35.1
BTN3: length 95.2
  TOP w0.203: U3.6 v1(76.65,39.1) ; J5.3 R6.2
  BOTTOM w0.203: v1(76.65,39.1) 75.2,37.65 54.33,37.65 51.13,34.45 51.13,21.09 50.36,20.32 J5.3 C36.1
BTN4: length 97.9
  TOP w0.203: J5.4 5.18,17.78 6.19,18.8 R7.2 ; U3.5 v1(77.92,39.12)
  BOTTOM w0.203: v1(77.92,39.12) 76.04,37.24 54.51,37.24 51.54,34.27 51.54,20.91 50.52,19.89 7.32,19.89 5.2,17.78 J5.4 C37.1
BTN5: length 100.7
  TOP w0.203: J5.5 6.35,17.27 R8.2 ; U3.4 v1(79.19,39.11)
  BOTTOM w0.203: v1(79.19,39.11) 76.91,36.84 54.69,36.84 51.94,34.09 51.94,20.73 50.7,19.49 8.57,19.49 J5.5 C38.1
BUZZER: length 13.2
  TOP w0.203: v1(63.07,21.95) 63.32,22.21 66.04,22.21 66.47,22.64 68.88,22.64 69.03,22.49 U3.27
  BOTTOM w0.203: R34.1 v1(63.07,21.95)
DIR_4988: length 68.2
  TOP w0.203: U3.16 61.93,33.68 61.59,34.02 61.59,39.35 v1(62,39.76)
  BOTTOM w0.203: v1(62,39.76) 61.59,40.16 61.59,52.35 U4.8 62.55,53.4 60.14,55.81 44.54,55.81 41.98,58.38 36.07,58.38 35.13,59.31 35.13,70.36 35.56,70.8 37.04,70.8 37.25,71 R14.1
DIR_6600: length 2.2
  BOTTOM w0.203: R14.2 J8.2
DIR_8825: length 33.6
  TOP w0.203: U3.9 v1(72.84,39.15)
  BOTTOM w0.203: v1(72.84,39.15) 73.6,39.91 75.44,39.91 76.53,41 76.53,51.14 76.73,51.34 91.41,51.34 U5.8
EN: length 64.5
  TOP w0.203: U3.3 v1(80.46,36.81) ; SW2.2 91.01,46.15 90.81,46.35 R11.1 v1(89.1,46.97) C8.1
  BOTTOM w0.203: v1(89.1,46.97) 81.08,46.97 80.46,46.35 v1(80.46,36.81) 80.46,22.12 83.74,18.83 83.74,3.36 83.03,2.65 80.31,2.65 79.76,3.2 J1.5
ENB_4988: length 78.3
  TOP w0.203: U4.1 35.37,53.4 33.88,54.9 33.88,58.07 35.59,59.77 v1(35.81,59.77) ; U3.8 v1(74.11,39.12)
  BOTTOM w0.203: v1(35.81,59.77) 35.81,60 35.53,60.28 35.53,70.19 35.74,70.39 38.2,70.39 38.77,70.96 R9.1 ; v1(74.11,39.12) 73.45,38.46 61.47,38.46 60.78,39.15 60.78,50.76 58.99,52.55 58.88,52.72 58.88,54.36 58.24,55 46.47,55 U4.1
ENB_6600: length 2.7
  BOTTOM w0.203: J8.1 38.77,74.66 R9.2
ENB_8825: length 19.5
  TOP w0.203: U3.11 v1(70.3,39.15)
  BOTTOM w0.203: U5.1 75.7,41.34 75.08,40.72 71.87,40.72 v1(70.3,39.15)
IO0_BOOT: length 51.3
  TOP w0.203: C9.1 R12.1 ; R12.1 90.82,11.58 91.01,11.38 SW1.2 ; R12.1 88.94,11.58 88.09,10.72 84.3,10.72 83.31,9.73 83.31,5.33 J1.6 ; v1(67.54,21.95) 66.69,21.95 66.49,21.75 U3.25
  BOTTOM w0.203: J1.6 83.34,5.36 83.34,18.65 81.16,20.83 73.69,20.83 72.85,21.67 68.43,21.67 68.15,21.95 v1(67.54,21.95)
LED: length 19.8
  TOP w0.203: U3.28 v1(70.3,17.37) ; R16.2 v1(65.66,8.15)
  BOTTOM w0.203: v1(70.3,17.37) 70,17.66 64.9,17.66 64.59,17.35 64.59,8.66 65.1,8.15 v1(65.66,8.15)
M0: length 13.3
  TOP w0.203: S2.1B 66.63,55.9 68.17,54.36 73.75,54.36 74.46,55.07 76.57,55.07 U5.2
M1: length 13.2
  TOP w0.203: S2.2B 70.35,54.77 73.57,54.77 74.28,55.48 78.7,55.48 U5.3
M2: length 12.7
  TOP w0.203: S2.3B 80.78,55.94 U5.4
MS1: length 13.9
  TOP w0.203: U4.2 45.69,55.12 43.59,55.12 42.29,53.83 37.79,53.83 S1.1B
MS2: length 13.9
  TOP w0.203: S1.2B 39.93,54.23 42.12,54.23 43.41,55.53 47.82,55.53 U4.3
MS3: length 12.8
  TOP w0.203: S1.3B 49.95,55.94 U4.4
PUL_6600: length 2.7
  BOTTOM w0.203: R15.2 35.72,74.66 J8.3
RX: length 4.5
  TOP w0.203: J1.4 76.71,4.83 R10.2
RXD0: length 11.7
  TOP w0.203: R13.1 75.19,11.16 78.23,14.2 78.23,20.17 U3.34
SCL: length 37
  TOP w0.203: U3.36 v1(80.46,19.18)
  BOTTOM w0.203: R18.2 60.93,4.85 J3.4 62.92,4.32 63.78,5.18 63.78,17.69 64.58,18.49 74.37,18.49 75.9,20.02 79.62,20.02 v1(80.46,19.18)
SDA: length 37.2
  TOP w0.203: U3.33 v1(76.65,19.23)
  BOTTOM w0.203: v1(76.65,19.23) 75.7,19.23 74.55,18.08 64.74,18.08 64.19,17.53 64.19,4.14 62.79,2.74 59.89,2.74 58.93,3.71 J3.3 59.41,4.8 R19.2
STEP_4988: length 65.4
  TOP w0.203: U3.12 v1(69.03,39.16)
  BOTTOM w0.203: v1(69.03,39.16) 68.73,38.87 61.65,38.87 61.19,39.33 61.19,52.32 U4.7 60.11,54.5 59.2,55.41 44.36,55.41 41.8,57.97 35.89,57.97 34.71,59.15 34.71,70.57 35.72,71.58 R15.1
STEP_8825: length 32.4
  TOP w0.203: U3.10 v1(71.57,39.15)
  BOTTOM w0.203: U5.7 89.28,51.75 76.45,51.75 76.12,51.42 76.12,41.18 75.26,40.32 72.73,40.32 v1(71.57,39.15)
T_CS: length 43.6
  TOP w0.203: U3.26 v1(67.76,19.23) ; J4.11 38.1,5.75 38.3,5.95 44.42,5.95 45.31,6.84 45.31,14.81 44.98,15.14 v1(44.98,15.22)
  BOTTOM w0.203: v1(67.76,19.23) 64.69,19.23 64.31,19.62 55.55,19.62 51.54,15.6 45.36,15.6 v1(44.98,15.22)
T_IRQ: length 37.8
  TOP w0.203: J4.14 v1(45.72,17.91) ; v1(53.72,23.4) 54.05,23.07 62.15,23.07 63.6,24.52 64.96,24.52 U3.23
  BOTTOM w0.203: v1(53.72,23.4) 53.16,22.84 53.16,20.22 50.85,17.91 v1(45.72,17.91)
TFT_CS: length 75.9
  TOP w0.203: v1(23.34,18.8) 26.31,15.83 26.31,8.24 24.99,6.91 18.08,6.91 17.78,6.61 J4.3 ; U3.29 v1(71.57,19.23)
  BOTTOM w0.203: v1(71.57,19.23) 69.98,19.23 69.19,20.02 55.35,20.02 51.33,16.01 44.88,16.01 44.48,16.41 43.41,16.41 42.98,16.85 25.32,16.85 23.37,18.8 v1(23.34,18.8)
TFT_DC: length 80.7
  TOP w0.203: v1(62.36,35.46) 62.36,38.91 63.26,39.81 67.55,39.81 67.76,39.6 U3.13 ; v1(25.7,18.37) 25.7,17.79 27.13,16.36 27.13,7.88 25.35,6.1 23.06,6.1 22.86,5.9 J4.5
  BOTTOM w0.203: v1(25.7,18.37) 26.01,18.67 51.04,18.67 52.76,20.4 52.76,33.74 55.04,36.02 61.8,36.02 v1(62.36,35.46)
TFT_LED: length 2.2
  BOTTOM w0.762: R4.1 J4.8
TFT_RST: length 81.8
  TOP w0.203: U3.14 66.49,39.2 66.28,39.4 64.19,39.4 63.2,38.41 v1(63.2,36.15) ; v1(24.59,18.8) 24.59,18.32 26.72,16.19 26.72,8.06 25.17,6.51 20.62,6.51 20.32,6.2 J4.4
  BOTTOM w0.203: v1(24.59,18.8) 24.87,19.08 50.87,19.08 52.35,20.56 52.35,33.91 54.86,36.43 62.36,36.43 62.64,36.15 v1(63.2,36.15)
TFT_SCK: length 70.9
  TOP w0.203: U3.30 v1(72.84,19.23) ; v1(27.94,17.53) J4.7 29.53,2.72 33.97,2.72 J4.10
  BOTTOM w0.203: v1(72.84,19.23) 71.64,20.43 55.15,20.43 51.13,16.41 45.06,16.41 44.65,16.82 43.59,16.82 42.88,17.53 v1(27.94,17.53)
TFT_SDI: length 90.8
  TOP w0.203: J4.12 38.64,2.32 27.4,2.32 J4.6 25.4,5.57 27.53,7.7 27.53,16.54 26.92,17.15 v1(26.92,17.94) ; U3.37 v1(81.73,19.23)
  BOTTOM w0.203: v1(26.92,17.94) 27.25,18.27 44.37,18.27 45.42,17.23 50.75,17.23 54.79,21.27 72.66,21.27 73.51,20.42 80.54,20.42 v1(81.73,19.23)
TFT_SDO: length 70.4
  TOP w0.203: v1(43.89,17.51) 44.3,17.1 44.3,14.92 44.91,14.31 44.91,7.02 44.25,6.36 33.45,6.36 33.02,5.92 J4.9 ; U3.31 v1(74.11,19.23)
  BOTTOM w0.203: v1(74.11,19.23) 72.5,20.84 54.94,20.84 50.93,16.82 45.24,16.82 44.55,17.51 v1(43.89,17.51) ; J4.13 41.59,2.72 34.61,2.72 J4.9
TX: length 4.5
  TOP w0.203: R13.2 75.19,4.83 J1.3
TXD0: length 11.3
  TOP w0.203: R10.1 76.71,11.69 78.87,13.85 78.87,20.17 U3.35
N15737205: length 3.9
  BOTTOM w0.762: D11.2 B1.1 57.96,33.32 R33.2
N15737229: length 3.7
  BOTTOM w0.762: B1.2 D11.1 57.78,27.67 Q3.3
N15737285: length 3
  BOTTOM w0.508: Q3.1 60.08,28.61 61.4,28.61 R35.1 R34.2
N15870025: length 1.3
  TOP w0.203: D4.1 R16.1
N15928174: length 5.1
  TOP w0.762: J1.1 D7.A
N15936945: length 5.1
  TOP w0.203: U4.5 U4.6
  BOTTOM w0.203: U4.5 U4.6
N15939447: length 5.1
  TOP w0.203: U5.5 U5.6
  BOTTOM w0.203: U5.5 U5.6
N15940057: length 1.2
  TOP w0.508: D3.1 R17.1
N15940775:
  vias: v1(1.89,51.14) v1(1.89,49.74) v1(1.89,48.34) v1(1.94,44.51) v1(1.94,43.11) v1(1.94,41.71) v1(3.29,51.14) v1(3.29,49.74) v1(3.29,48.34) v1(3.34,44.51) v1(3.34,43.11) v1(3.34,41.71) v1(4.69,51.14) v1(4.69,49.74) v1(4.69,48.34) v1(4.74,44.51) v1(4.74,43.11) v1(4.74,41.71) v1(7.56,51.11) v1(7.56,49.71) v1(7.56,48.31) v1(7.66,44.54) v1(7.66,43.14) v1(7.66,41.74) v1(8.96,51.11) v1(8.96,49.71) v1(8.96,48.31) v1(9.06,44.54) v1(9.06,43.14) v1(9.06,41.74) v1(10.36,51.11) v1(10.36,49.71) v1(10.36,48.31) v1(10.46,44.54) v1(10.46,43.14) v1(10.46,41.74)
N15941130: length 3.3
  TOP w1.016: U6.4 C31.2
N15942034: length 5.5
  TOP w0.762: v1(27.91,31.71) C3.1 ; v1(27.91,40.8) C10.1
  BOTTOM w0.762: C4.1 v1(27.91,40.8) ; C32.1 v1(27.91,31.71)

## Copper pours and planes (outline as drawn; the poured copper is in the pictures)
+3.3V on TOP (solid shape): 82.63,45.52 82.63,42.98 82.4,42.75 82.32,42.75 82.02,42.45 82.02,40.09 82.22,39.88 82.22,37.24 82.17,37.19 81.28,37.19 81.23,37.24 81.23,39.25 80.72,39.76 80.72,45.52 80.82,45.62 82.52,45.62
+3.3V on TOP (solid shape): 58.45,38.87 58.45,36.73 58.01,36.3 53.14,36.3 52.17,35.34 52.17,34.3 51,33.13 49.91,33.13 49.35,32.57 49.35,30.69 48.51,29.85 44.32,29.85 43.71,29.24 43.71,26.9 43.61,26.8 37.31,26.8 37.21,26.9 37.21,32.92 37.29,33 45.92,33 46.2,33.28 46.2,34.93 47.49,36.21 49.57,36.21 50.9,37.55 56.36,37.55 57.9,39.08 58.23,39.08
+5V on TOP (solid shape): 37.03,43.24 37.03,39.53 39.12,37.45 39.12,34.98 38.84,34.7 36.75,34.7 36.42,34.37 36.42,31.93 36.37,31.88 35.61,31.88 35.56,31.93 35.56,34.32 34.7,35.18 34.7,37.62 32.54,39.78 32.54,43.24 32.69,43.39 36.88,43.39
+24V on TOP (solid shape): 17.3,70.47 17.3,67.24 17.75,66.78 18.03,66.78 18.19,66.63 18.19,65.11 18.52,64.78 20.62,64.78 20.78,64.62 20.78,62.29 20.73,62.24 18.57,62.24 18.16,61.83 18.16,60.81 17.98,60.64 11.63,60.64 11.35,60.92 11.35,65.69 11.25,65.79 9.55,65.79 9.53,65.82 9.53,66.71 9.6,66.78 12.98,66.78 13.51,67.32 13.51,70.49 13.87,70.85 16.92,70.85
+24V on BOTTOM (solid shape): 27.53,73.36 27.53,68.54 27.05,68.05 24.08,68.05 23.62,68.51 23.62,71.74 22.83,72.52 18.34,72.52 17.3,71.48 17.3,68.64 16.71,68.05 14.02,68.05 13.51,68.56 13.51,73.39 15.62,75.49 25.4,75.49
+24V_OUT on TOP (solid shape): 76.73,66.3 76.73,60.53 76.53,60.33 73.86,60.33 73.63,60.56 73.63,62.16 73.1,62.69 69.09,62.69 66.88,60.48 66.88,58.88 64.72,56.72 43.56,56.72 41.58,58.71 41.58,62.21 41.33,62.46 33.73,62.46 29.08,57.82 26.87,57.82 24.18,55.12 24.18,47.38 24.13,47.33 22.07,47.33 21.92,47.48 21.92,49.89 21.62,50.2 19.3,50.2 18.41,49.31 15.27,49.31 15.24,49.33 15.24,52.41 16.13,53.3 16.13,58.76 16.26,58.88 18.31,58.88 18.85,59.42 18.85,60.46 18.95,60.56 21.72,60.56 22.17,61.02 22.17,63.94 22.56,64.32 27.23,64.32 28.47,65.56 37.34,65.56 37.34,64.27 37.34,64.25 37.35,64.2 37.36,64.16 37.38,64.12 37.41,64.09 37.45,64.06 37.48,64.04 37.53,64.02 37.57,64.01 37.59,64.01 39.19,64.01 39.21,64.01 39.26,64.02 39.3,64.04 39.34,64.06 39.37,64.09 39.4,64.12 39.42,64.16 39.44,64.2 39.45,64.25 39.45,64.27 39.45,65.56 39.45,65.59 39.44,65.63 39.42,65.67 39.4,65.71 39.37,65.74 39.34,65.77 39.3,65.79 39.26,65.81 39.21,65.82 39.19,65.82 37.59,65.82 37.57,65.82 37.53,65.81 37.48,65.79 37.45,65.77 37.41,65.74 37.38,65.71 37.36,65.67 37.35,65.63 37.34,65.59 37.34,65.56 28.47,65.56 29.79,66.88 45.29,66.88 45.87,66.3 45.87,60.31 46.48,59.7 63.09,59.7 64.06,60.66 64.06,61.96 65.1,63 65.1,65.44 68.22,65.44 68.22,64.32 68.22,64.3 68.23,64.25 68.25,64.21 68.27,64.17 68.3,64.14 68.33,64.11 68.37,64.09 68.41,64.07 68.46,64.07 68.48,64.06 69.88,64.06 69.9,64.07 69.94,64.07 69.98,64.09 70.02,64.11 70.06,64.14 70.08,64.17 70.11,64.21 70.12,64.25 70.13,64.3 70.13,64.32 70.13,65.44 70.13,65.46 70.12,65.5 70.11,65.54 70.08,65.58 70.06,65.62 70.02,65.64 69.98,65.67 69.94,65.68 69.9,65.69 69.88,65.69 68.48,65.69 68.46,65.69 68.41,65.68 68.37,65.67 68.33,65.64 68.3,65.62 68.27,65.58 68.25,65.54 68.23,65.5 68.22,65.46 68.22,65.44 65.1,65.44 66.6,66.93 76.1,66.93
GND on TOP: 0.25,0.25 0.25,79.74 94.75,79.74 94.75,42.76 84.75,42.76 84.75,16.23 94.75,16.23 94.75,0.25 ; 18 cut-outs
GND on BOTTOM: 0.25,0.25 0.25,79.74 94.75,79.74 94.75,42.76 84.75,42.76 84.75,16.23 94.75,16.23 94.75,0.25 ; 4 cut-outs
VCC on BOTTOM (solid shape): 13.97,6.84 13.97,5.67 13.56,5.26 13.56,3.51 13.51,3.46 10.59,3.46 10.31,3.74 10.31,6.43 10.77,6.89 13.92,6.89
N15940775 on TOP (solid shape): 12.12,52.36 12.12,49.23 14.33,47.02 18.29,47.02 18.41,46.89 18.41,46.06 18.26,45.9 14.3,45.9 12.12,43.72 12.12,40.8 11.68,40.37 10.97,40.37 10.24,39.63 10.24,37.06 10.31,36.99 12.32,36.99 12.42,36.89 12.42,31.32 12.37,31.27 6.32,31.27 4.5,33.1 4.5,39.68 3.81,40.37 0.86,40.37 0.58,40.65 0.58,52.41 0.71,52.53 11.94,52.53
N15942034 on TOP (solid shape): 23.75,43.36 23.75,41 24.1,40.65 28.68,40.65 28.8,40.52 28.8,37.7 29.34,37.17 32.99,37.17 33.02,37.14 33.02,35.24 32.99,35.21 29.34,35.21 28.78,34.65 28.78,31.88 28.17,31.27 18.69,31.27 18.64,31.32 18.64,36.89 18.69,36.94 20.57,36.94 20.62,36.99 20.62,39.2 21.59,40.16 21.59,43.67 21.64,43.72 23.39,43.72
N15942465 on TOP (solid shape): 20.68,45.19 20.68,41.28 20.62,41.23 19.94,41.23 19.89,41.28 19.89,44.05 19.74,44.2 15.27,44.2 15.19,44.28 15.19,45.24 15.27,45.32 20.55,45.32
N15945795 on TOP (solid shape): 13.54,58.76 13.54,53.47 13.49,53.42 12.42,53.42 12.32,53.52 12.32,54.67 11.53,55.45 11.53,56.57 11.02,57.08 9.91,57.08 9.91,58.83 10.16,59.09 13.21,59.09
+3.3V on BOTTOM (solid shape): 43.28,34.09 43.64,33.94 43.79,33.58 43.79,27.26 43.64,26.9 43.28,26.75 37.64,26.75 37.28,26.9 37.13,27.26 37.13,33.58 37.28,33.94 37.64,34.09
N15940775 on BOTTOM (solid shape): 11.63,52.56 11.99,52.41 12.14,52.05 12.14,40.87 11.99,40.52 11.63,40.37 1.09,40.37 0.73,40.52 0.58,40.87 0.58,52.05 0.73,52.41 1.09,52.56

Small or netless copper shapes (teardrops, artwork), in the pictures only: 294 on TOP, 149 on BOTTOM

## Text on the board
Ref Des/Silkscreen Bottom: BOOT | RESET | GND | VCC | 12-24VDC
Ref Des/Silkscreen Top: VCC | GND | CS | RST | DC | SDI | SCK | LED | SDO | Name | Date | Ver | CLK | 04/2026 | LCD_TFT_TOUCH | DIN | MAIN | 2.1 | DO | IRQ | 5V | SDA | SCL | I2C | 3.3V | RX0 | TX | RX | TX0 | EN | BOOT | DEBUG | VMOT | M1 | M2 | 2B | M3 | 2A | 1A | 1B | SLP | VDD | STEP | DIR | B2 | A1 | A2 | TB_6600 | PUL | ENB | BT1 | BT2 | BT3 | BT4 | BT5 | BUTTON | X - Fishing
User.7: FIGURE | FINISHED_SIZE | 15.0 | 32.0 | 33.465 | 39.37 | 40.0 | 42.0 | 62.0 | DRILL CHART: TOP to BOTTOM | ALL UNITS ARE IN MILS | PLATED | QTY | 372 | 4 | 12 | 2 | 7 | 23 | 42 | 472 | TOTAL HOLES:
